# EAGLE board 05-eagleClass-555-board-placements (EAGLE 7.6.0)

Size 100 x 80 mm. Coordinates in mm from the lower left corner, seen from the top.
Outline: 0,0 100,0 100,80 0,80 0,0
Outline: 7.62,25.4 7.62,43.18 17.78,53.34 29.21,58.42 49.53,58.42 59.69,53.34 69.85,43.18 69.85,25.4 7.62,25.4
Copper layers (1*16): Top 0.035mm / dielectric 1.5mm / Bottom 0.035mm
Design rules "default": minimum track width 10mil, minimum drill 24mil, track to track 8mil, track to pad 8mil, pad to pad 8mil, via to via 8mil, smd to smd 8mil, copper to edge 40mil, drill to drill 8mil, minimum pad ring 10mil, minimum via ring 8mil, stop-mask expansion 4mil, vias tented up to drill 0mil, thermal gap 10mil

## Footprints (pad centres in the part's own frame; a part is rotated, then mirrored left to right if it is on the bottom)
AXIAL-5MM = drill 0.9 pad 1.88: P$1 -2.5,0; P$2 2.5,0
LED5MM = drill 0.813 pad 1.88: A -1.27,0; K 1.27,0
DIL-08 = drill 0.813 long: 1 -3.81,-3.81; 2 -1.27,-3.81; 3 1.27,-3.81; 4 3.81,-3.81; 5 3.81,3.81; 6 1.27,3.81; 7 -1.27,3.81; 8 -3.81,3.81
AXIAL-0.3EZ = drill 0.9 pad 1.88: P$1 -3.81,0; P$2 3.81,0
CR2032-THRU = drill 2 pad 3.81 octagon: +1 -10.668,0; +2 10.668,0 | smd 10.16 x 10.16: - 0,0

## Placement (x,y rotation side)
C1  1UF  [AXIAL-5MM]  30.48,59.69 180 top
D4  WHITE-30mA  [LED5MM]  45.72,58.42 90 top
IC1  NE555  [DIL-08]  29.21,52.07 90 top
R4  100  [AXIAL-0.3EZ]  41.91,52.07 0 top
R5  1K  [AXIAL-0.3EZ]  20.32,45.72 270 top
R6  470K  [AXIAL-0.3EZ]  20.32,57.15 90 top
U$1  [CR2032-THRU]  27.94,33.02 180 top
U$2  [CR2032-THRU]  49.53,41.91 0 top

## Library data of the parts
C1 = SparkFun-Capacitors; PROD_ID: 445-8517-ND
D4 = SparkFun-LED; PROD_ID: 67-2062-ND
IC1 = st-microelectronics; MF: Arrow Electronics; MPN: NE555N; OC_FARNELL: 1467742; OC_NEWARK: 89K1486; PROD_ID: 296-1857-5-ND
R4 R6 = SparkFun-Resistors; PROD_ID: RES-08380
R5 = SparkFun-Resistors; PROD_ID: 1.0KQBK-ND
U$1 U$2 = adafruit

## Nets
DISCHARGE: IC1.7 R5.P$1 R6.P$1
GND: C1.P$1 D4.K IC1.1 U$1.-
N$2: D4.A R4.P$2
N$3: IC1.2
N$4: U$1.+1 U$1.+2 U$2.-
OUT: IC1.3 R4.P$1
THRESHOLD: C1.P$2 IC1.6 R6.P$2
VCC: IC1.4 IC1.8 R5.P$2 U$2.+1

## Tracks (layer width: path | path; a pad name or v marks a point on that pad's centre or on a via)
DISCHARGE  (2 unrouted)
GND  (3 unrouted)
N$2  (1 unrouted)
N$4  (2 unrouted)
OUT  (1 unrouted)
THRESHOLD  (2 unrouted)
VCC  (3 unrouted)